# EAGLE board 8 steps sequencer (EAGLE 7.4.0)
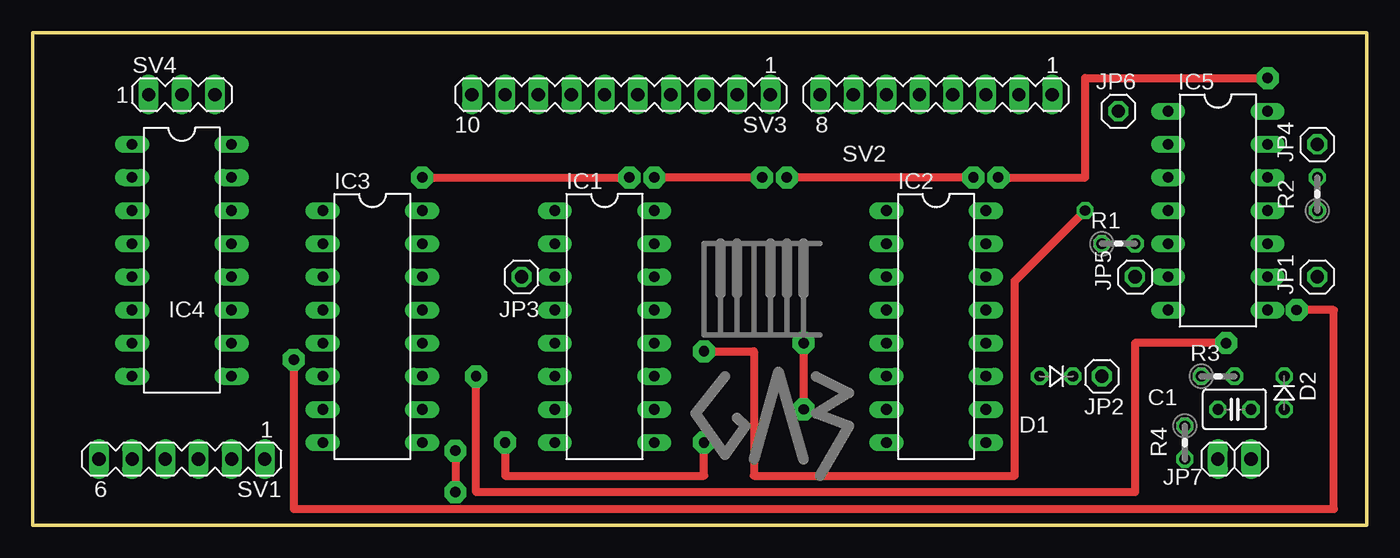
[diagram p0: board, top side]
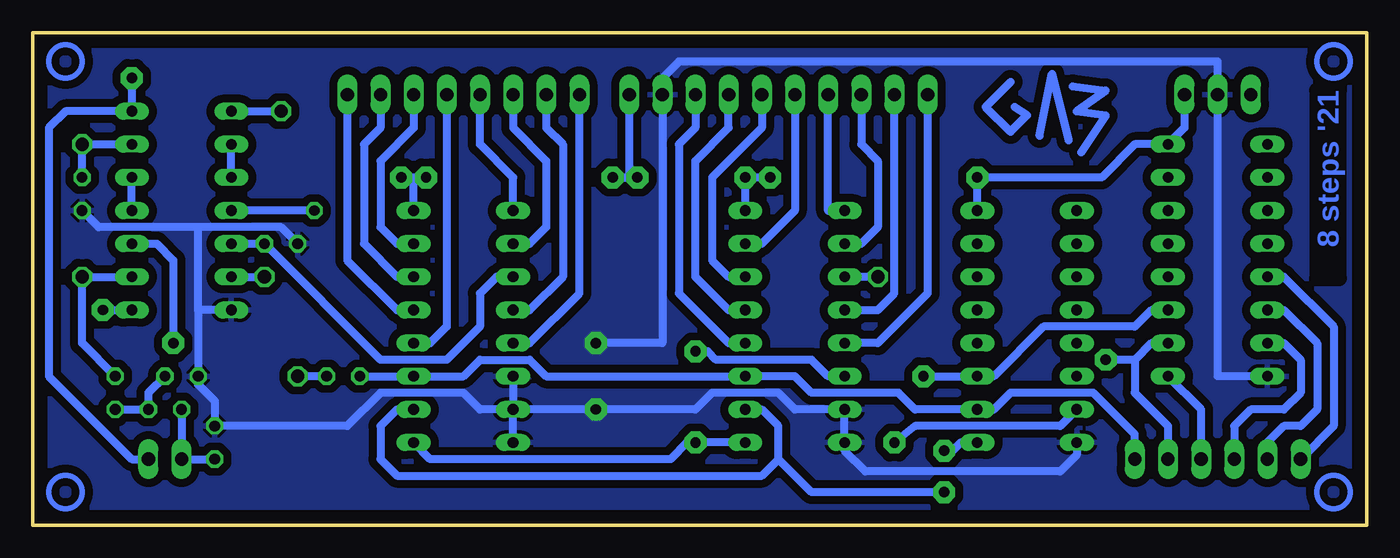
[diagram p1: board, bottom side, seen from below]

Size 102.22 x 37.77 mm. Coordinates in mm from the lower left corner, seen from the top.
Outline: 0,0 102.22,0 102.22,37.77 0,37.77 0,0
Copper layers (1*16): Top 0.035mm / dielectric 1.5mm / Bottom 0.035mm
Design rules "default": minimum track width 10mil, minimum drill 24mil, track to track 8mil, track to pad 8mil, pad to pad 8mil, via to via 8mil, smd to smd 8mil, copper to edge 40mil, drill to drill 8mil, minimum pad ring 10mil, minimum via ring 8mil, stop-mask expansion 4mil, vias tented up to drill 0mil, thermal gap 10mil

## Footprints (pad centres in the part's own frame; a part is rotated, then mirrored left to right if it is on the bottom)
C025-030X050 = drill 0.813 octagon: 1 -1.27,0; 2 1.27,0
D-2.5 = drill 0.813 octagon: A 1.27,0; C -1.27,0
DIL16 = drill 0.813 long: 1 -8.89,-3.81; 2 -6.35,-3.81; 3 -3.81,-3.81; 4 -1.27,-3.81; 5 1.27,-3.81; 6 3.81,-3.81; 7 6.35,-3.81; 8 8.89,-3.81; 9 8.89,3.81; 10 6.35,3.81; 11 3.81,3.81; 12 1.27,3.81; 13 -1.27,3.81; 14 -3.81,3.81; 15 -6.35,3.81; 16 -8.89,3.81
DIL14 = drill 0.813 long: 1 -7.62,-3.81; 2 -5.08,-3.81; 3 -2.54,-3.81; 4 0,-3.81; 5 2.54,-3.81; 6 5.08,-3.81; 7 7.62,-3.81; 8 7.62,3.81; 9 5.08,3.81; 10 2.54,3.81; 11 0,3.81; 12 -2.54,3.81; 13 -5.08,3.81; 14 -7.62,3.81
1X01 = drill 1.016 octagon: 1 0,0
1X02 = drill 1.016 long: 1 -1.27,0; 2 1.27,0
0204V = drill 0.813 octagon: 1 -1.27,0; 2 1.27,0
MA06-1 = drill 1.016 long: 1 -6.35,0; 2 -3.81,0; 3 -1.27,0; 4 1.27,0; 5 3.81,0; 6 6.35,0
MA08-1 = drill 1.016 long: 1 -8.89,0; 2 -6.35,0; 3 -3.81,0; 4 -1.27,0; 5 1.27,0; 6 3.81,0; 7 6.35,0; 8 8.89,0
MA10-1 = drill 1.016 long: 1 -11.43,0; 2 -8.89,0; 3 -6.35,0; 4 -3.81,0; 5 -1.27,0; 6 1.27,0; 7 3.81,0; 8 6.35,0; 9 8.89,0; 10 11.43,0
MA03-1 = drill 1.016 long: 1 -2.54,0; 2 0,0; 3 2.54,0

## Placement (x,y rotation side)
C1  [C025-030X050]  92.08,8.89 180 top
D1  1N4148  [D-2.5]  78.42,11.43 180 top
D2  1N4148  [D-2.5]  95.89,10.16 270 top
IC1  4051N  [DIL16]  43.81,15.24 270 top
IC2  4051N  [DIL16]  69.22,15.24 270 top
IC3  4040N  [DIL16]  26.04,15.24 270 top
IC4  4040N  [DIL16]  11.43,20.32 270 top
IC5  40106N  [DIL14]  90.8,24.13 270 top
JP1  CK_IN  [1X01]  98.42,19.05 90 top
JP2  CK_OUT  [1X01]  81.91,11.43 0 top
JP3  CV_OUT  [1X01]  37.46,19.05 180 top
JP4  RESET  [1X01]  98.42,29.21 90 top
JP5  GATE_OUT  [1X01]  84.45,19.05 90 top
JP6  CV_silencer  [1X01]  83.19,31.75 90 top
JP7  STEP  [1X02]  92.08,5.08 0 top
R1  10k  [0204V]  83.19,21.59 0 top
R2  1k  [0204V]  98.42,25.4 90 top
R3  [0204V]  90.8,11.43 0 top
R4  [0204V]  88.27,6.35 270 top
SV1  DIV_SEL  [MA06-1]  11.43,5.08 180 top
SV2  GATE_SWS  [MA08-1]  69.22,33.02 180 top
SV3  POTS  [MA10-1]  45.09,33.02 180 top
SV4  PWR  [MA03-1]  11.43,33.02 0 top

## Library data of the parts
C1 R1-R4 = rcl
D1 D2 = diode
IC1-IC5 = 40xx
JP1-JP7 = pinhead
SV1-SV4 = con-lstb; OC_FARNELL: unknown; OC_NEWARK: unknown

## Nets
GND: IC1.7 IC1.8 IC2.6 IC2.7 IC2.8 IC3.8 IC4.8 IC5.7 R1.1 R2.1 R3.1 R4.1 SV3.2 SV4.2
N$1: D2.C IC5.9 JP1.1
N$2: IC4.10 IC5.8 SV1.2
N$3: IC4.9 SV1.3
N$4: IC4.7 SV1.4
N$5: IC4.6 SV1.5
N$6: IC4.5 SV1.6
N$7: IC2.13 SV2.1
N$8: D1.A IC1.11 IC2.11 IC3.10 SV1.1
N$9: IC1.10 IC2.10 IC3.9
N$10: IC1.9 IC2.9 IC3.7
N$11: IC2.14 SV2.2
N$12: IC2.15 SV2.3
N$13: IC2.12 SV2.4
N$14: IC2.1 SV2.5
N$15: IC2.5 SV2.8
N$16: IC2.2 SV2.6
N$17: IC2.4 SV2.7
N$18: IC1.1 SV3.7
N$19: IC1.2 SV3.8
N$20: IC1.4 SV3.9
N$21: IC1.5 SV3.10
N$22: IC1.15 SV3.6
N$23: IC1.14 SV3.5
N$24: IC1.13 SV3.4
N$25: IC1.12 SV3.3
N$26: IC1.3 JP3.1
N$27: IC5.11 IC5.12
N$28: IC5.13 JP4.1 R2.2
N$29: IC2.3 IC5.5 R1.2
N$30: D1.C JP2.1
N$32: IC5.2 IC5.3
N$33: IC5.6 JP5.1
N$34: IC5.1 JP6.1
N$35: IC1.6 IC5.4
N$36: C1.2 JP7.1 R4.2
N$38: C1.1 D2.A R3.2
N$39: IC3.11 IC4.11 IC5.10
VCC: IC1.16 IC2.16 IC3.16 IC4.16 IC5.14 JP7.2 SV3.1 SV4.3

## Tracks (layer width: path | path; a pad name or v marks a point on that pad's centre or on a via)
GND  (via drill 0.8 pad 1.68)
  Top 0.61: v59.05,13.97 v59.05,8.89
  Bottom 0.61: IC2.8 IC2.7 | IC4.8 11.43,11.43 SV4.2 11.43,35.56 52.7,35.56 53.98,34.29 SV3.2 53.98,13.97 v59.05,13.97 | IC5.7 89.53,16.51 | 89.53,16.51 R3.1 89.53,10.79 88.27,9.53 R4.1 78.11,7.62 75.56,10.16 69.22,10.16 67.94,8.89 IC2.7 | 89.53,16.51 89.53,22.86 | 89.53,22.86 97.16,22.86 R2.1 | R1.1 83.19,22.86 89.53,22.86 | IC2.7 v59.05,8.89 51.44,8.89 50.16,10.16 45.09,10.16 43.81,8.89 IC1.7 IC1.8 40,5.71 38.42,4.13 23.49,4.13 22.22,5.4 IC3.8 | IC2.6 IC2.7
  pour Bottom (isolate 0.61): 0,37.78 102.23,37.78 102.23,0 0,0
N$1
  Bottom 0.61: IC5.9 JP1.1 98.42,13.97 D2.C
N$2  (via drill 0.8 pad 1.68)
  Top 0.61: v20,12.7 20,1.27 99.69,1.27 99.69,16.51 v96.84,16.51
  Bottom 0.61: IC4.10 16.51,13.97 17.78,12.7 | 17.78,12.7 17.78,10.16 15.24,7.62 SV1.2 | 17.78,12.7 v20,12.7 | v96.84,16.51 IC5.8
N$3
  Bottom 0.61: SV1.3 12.7,8.89 IC4.9
N$4
  Bottom 0.61: IC4.7 6.35,13.97 5.08,12.7 5.08,10.16 6.35,8.89 8.89,8.89 10.16,7.62 SV1.4
N$5
  Bottom 0.61: IC4.6 6.35,16.51 3.81,13.97 3.81,8.89 5.08,7.62 6.35,7.62 7.62,6.35 SV1.5
N$6
  Bottom 0.61: IC4.5 6.35,19.05 2.54,15.24 2.54,7.62 SV1.6
N$7
  Bottom 0.61: SV2.1 78.11,20.32 74.3,16.51 IC2.13
N$8
  Bottom 0.61: D1.A IC2.11 69.22,11.43 67.94,12.7 64.14,12.7 62.86,11.43 IC1.11 43.81,11.43 42.55,10.16 35.88,10.16 34.61,8.89 IC3.10 28.57,8.89 27.3,10.16 20.95,10.16 17.78,6.99 SV1.1
N$9  (via drill 0.8 pad 1.68)
  Top 0.61: v32.38,5.71 v32.38,2.54
  Bottom 0.61: IC2.10 74.3,8.89 75.56,7.62 75.56,5.08 74.3,3.81 46.35,3.81 45.09,5.08 | 45.09,5.08 45.09,7.62 46.35,8.89 IC1.10 | IC3.9 31.12,6.35 31.75,5.71 v32.38,5.71 | v32.38,2.54 42.55,2.54 45.09,5.08
N$10  (via drill 0.8 pad 1.68)
  Top 0.61: v36.2,6.35 36.2,3.81 51.44,3.81 v51.44,6.35
  Bottom 0.61: IC1.9 v51.44,6.35 52.07,6.35 53.34,5.08 71.75,5.08 IC2.9 | IC3.7 23.49,7.62 34.61,7.62 v36.2,6.35
N$11
  Bottom 0.61: SV2.2 75.56,30.48 76.83,29.21 76.83,21.59 74.3,19.05 IC2.14
N$12
  Bottom 0.61: SV2.3 73.03,30.48 75.56,27.94 75.56,22.86 74.3,21.59 IC2.15
N$13
  Bottom 0.61: SV2.4 70.48,15.24 71.75,13.97 IC2.12
N$14
  Bottom 0.61: IC2.1 65.41,26.67 67.94,29.21 SV2.5
N$15
  Bottom 0.61: IC2.5 64.14,13.97 60.32,17.78 SV2.8
N$16
  Bottom 0.61: SV2.6 65.41,30.48 62.86,27.94 62.86,22.86 64.14,21.59 IC2.2
N$17
  Bottom 0.61: SV2.7 62.86,30.48 61.59,29.21 61.59,19.05 64.14,16.51 IC2.4
N$18
  Bottom 0.61: IC1.1 41.27,24.13 SV3.7
N$19
  Bottom 0.61: IC1.2 38.73,21.59 37.46,22.86 37.46,27.94 38.73,29.21 SV3.8
N$20
  Bottom 0.61: IC1.4 37.46,16.51 36.2,17.78 SV3.9
N$21
  Bottom 0.61: SV3.10 33.66,17.78 37.46,13.97 IC1.5
N$22
  Bottom 0.61: SV3.6 43.81,24.13 46.35,21.59 IC1.15
N$23
  Bottom 0.61: SV3.5 46.35,30.48 50.16,26.67 50.16,20.32 48.89,19.05 IC1.14
N$24
  Bottom 0.61: IC1.13 48.89,16.51 51.44,19.05 51.44,27.94 48.89,30.48 SV3.4
N$25
  Bottom 0.61: SV3.3 51.44,30.48 52.7,29.21 52.7,17.78 48.89,13.97 IC1.12
N$26
  Bottom 0.61: JP3.1 IC1.3
N$27
  Bottom 0.61: IC5.11 IC5.12
N$28
  Bottom 0.61: IC5.13 JP4.1 R2.2
N$29
  Bottom 0.61: IC5.5 R1.2 75.56,12.7 70.48,12.7 67.94,15.24 67.94,17.78 66.67,19.05 IC2.3
N$30
  Bottom 0.61: D1.C JP2.1
N$31
  pour Bottom (isolate 0.61): 0,37.78 102.23,37.78 102.23,0 0,0
N$32
  Bottom 0.61: IC5.3 IC5.2
N$33
  Bottom 0.61: IC5.6 JP5.1
N$34
  Bottom 0.61: IC5.1 JP6.1
N$35  (via drill 0.8 pad 1.27, 0.8 pad 1.68)
  Top 0.61: v51.44,13.34 55.24,13.34 55.24,3.81 75.25,3.81 75.25,18.73 v80.64,24.13
  Bottom 0.61: IC1.6 41.27,11.43 42.55,12.7 49.85,12.7 50.48,13.34 v51.44,13.34 | v80.64,24.13 IC5.4
N$36
  Bottom 0.61: C1.2 JP7.1 R4.2
N$37
  Bottom 0.61: 27.3,33.97 29.21,32.07 27.3,30.16 26.04,31.43 26.99,32.07
N$38
  Bottom 0.61: R3.2 93.34,10.16 C1.1 D2.A
N$39  (via drill 0.8 pad 1.68)
  Top 0.61: v91.44,13.97 84.45,13.97 84.45,2.54 33.97,2.54 v33.97,11.43
  Bottom 0.61: IC4.11 16.51,16.51 17.78,15.24 24.77,15.24 28.57,11.43 IC3.11 v33.97,11.43 | IC5.10 92.71,21.59 91.44,20.32 v91.44,13.97
N$40
  Bottom 0.61: 25.08,29.84 24.13,34.61 22.86,29.53
N$41
  Bottom 0.61: 22.54,33.66 20,33.34 22.22,31.75 20,31.43 21.91,28.57
VCC  (via drill 0.8 pad 1.68)
  Top 0.61: v72.07,26.67 v57.78,26.67 | v55.88,26.67 v47.62,26.67 | v29.84,26.67 v45.72,26.67 | v73.98,26.67 80.64,26.67 80.64,34.29 v94.61,34.29
  Bottom 0.61: SV4.3 13.97,30.48 IC4.16 17.78,29.21 20.32,26.67 v29.84,26.67 IC3.16 | JP7.2 94.61,5.08 100.97,11.43 100.97,30.48 99.69,31.75 IC5.14 v94.61,34.29 | SV3.1 56.52,26.67 v57.78,26.67 v55.88,26.67 | IC1.16 v47.62,26.67 v45.72,26.67 | IC2.16 73.03,26.67 v72.07,26.67 v73.98,26.67
(copper drawn outside any net)
  shapes: Bottom circle x4

## Text on the board
Bottom: 8 steps '21
tValues: 5-7-6-4-2-1-0-3 | 5-7-6-4-2-1-0-3
tDocu: 8 steps analog sequencer | B001